# EAGLE board arduino_Uno_Rev3-02-TH (EAGLE 7.7.0)
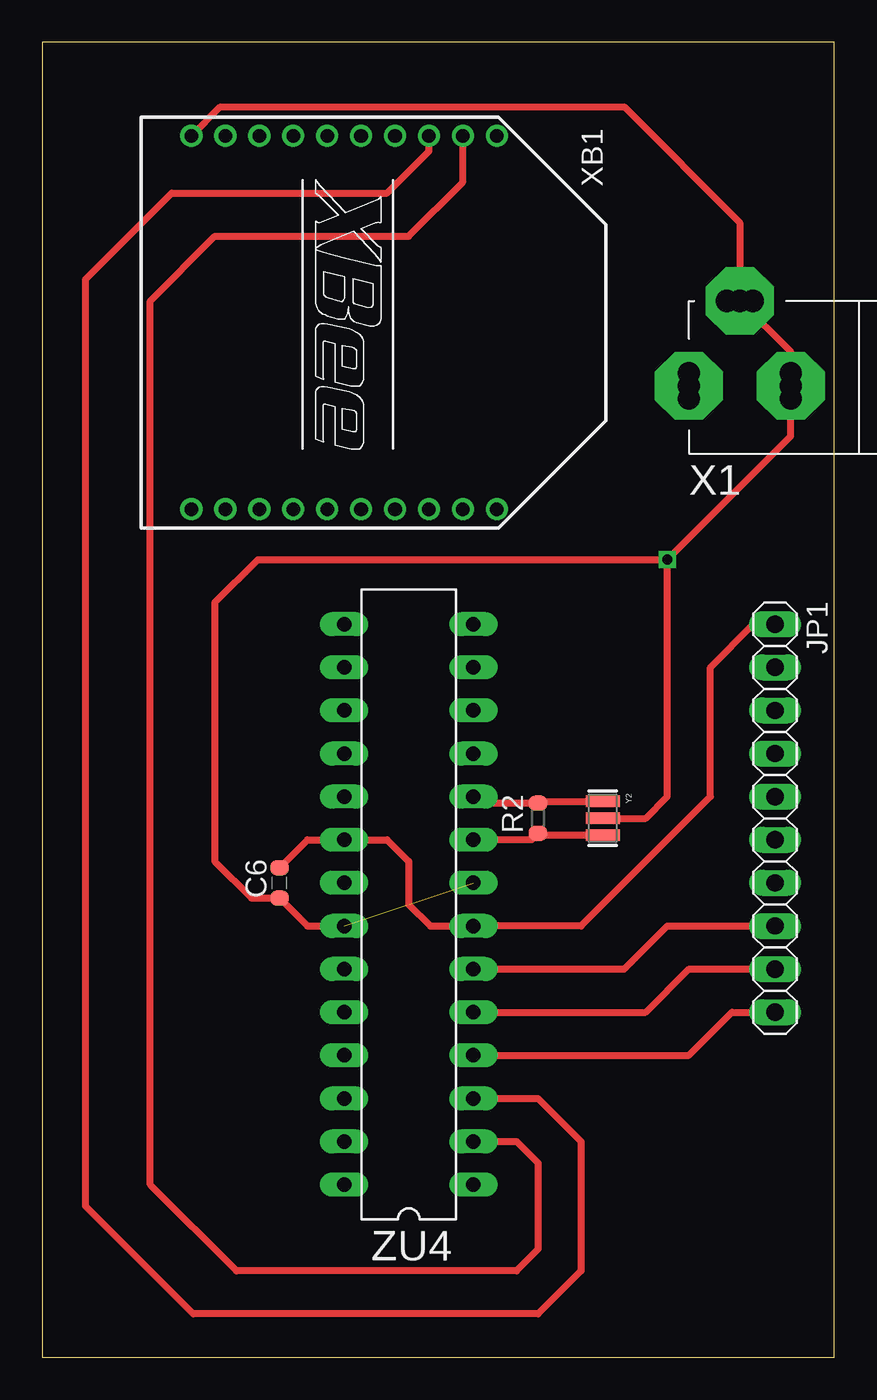
[diagram p0: board, top side]
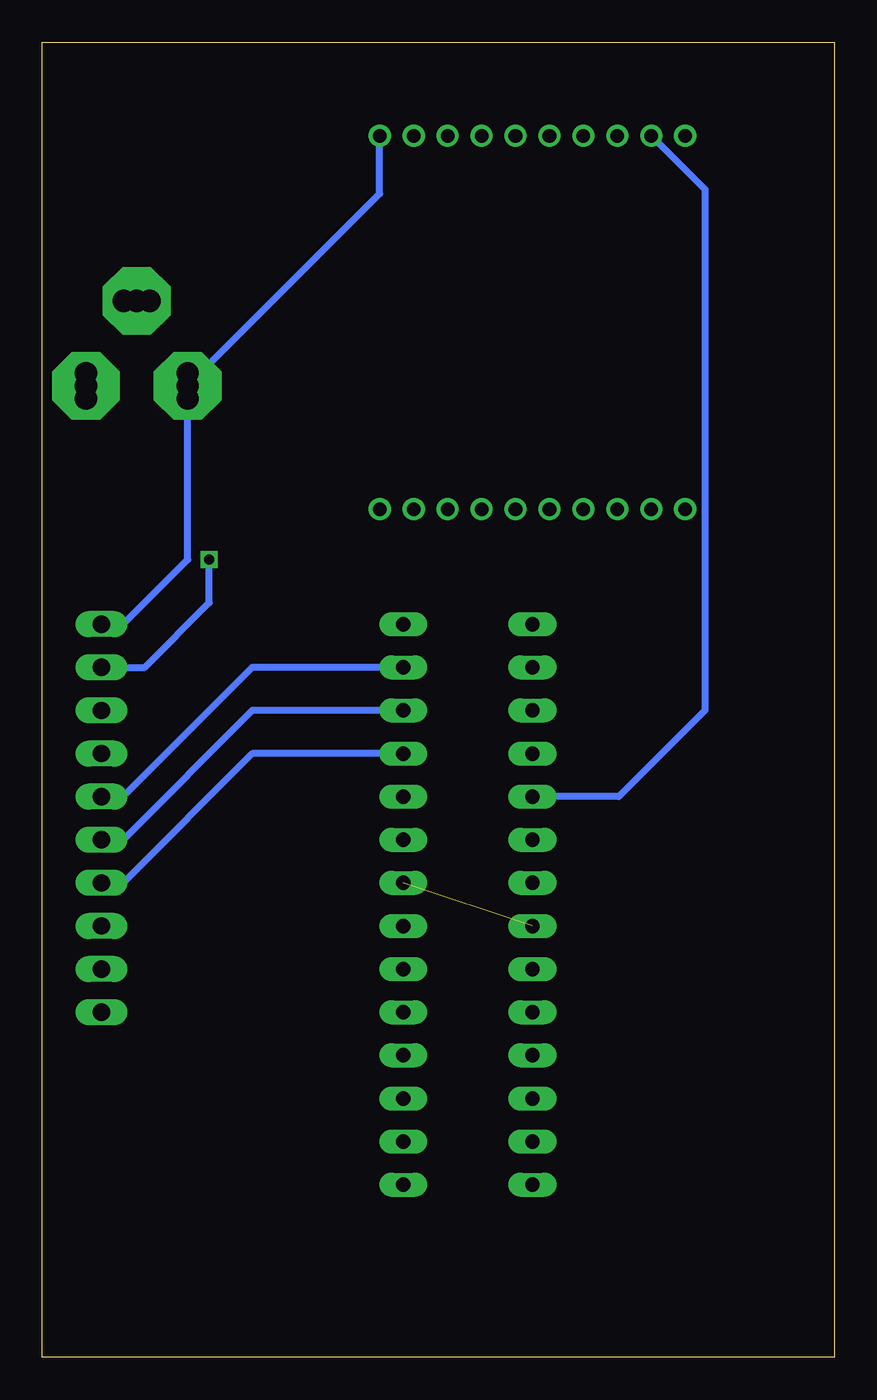
[diagram p1: board, bottom side, seen from below]

Size 46.66 x 77.46 mm. Coordinates in mm from the lower left corner, seen from the top.
Outline: 0,0 46.66,0 46.66,77.46 0,77.46 0,0
Copper layers (1*16): Top 0.035mm / dielectric 1.5mm / Bottom 0.035mm
Design rules "default": minimum track width 10mil, minimum drill 24mil, track to track 8mil, track to pad 8mil, pad to pad 8mil, via to via 8mil, smd to smd 8mil, copper to edge 40mil, drill to drill 8mil, minimum pad ring 10mil, minimum via ring 8mil, stop-mask expansion 4mil, vias tented up to drill 0mil, thermal gap 10mil
Net classes: 0 default: width 0.254 mm, clearance 0.254 mm; 1 power: width 0.61 mm, drill 0.61 mm, clearance 0.254 mm; 2 gnd: width 0.305 mm, drill 0.559 mm, clearance 0.254 mm; 3 usbvcc: width 0.508 mm, drill 0.61 mm, clearance 0.254 mm; 4 aref: width 0.406 mm, drill 0.61 mm, clearance 0.254 mm

## Footprints (pad centres in the part's own frame; a part is rotated, then mirrored left to right if it is on the bottom)
C0603-ROUND = smd 0.898 x 1.1: 1 -0.889,0; 2 0.889,0
1X10 = drill 1.016 long: 1 -11.43,0; 2 -8.89,0; 3 -6.35,0; 4 -3.81,0; 5 -1.27,0; 6 1.27,0; 7 3.81,0; 8 6.35,0; 9 8.89,0; 10 11.43,0
R0603-ROUND = smd 0.898 x 1.1: 1 -0.889,0; 2 0.889,0
POWERSUPPLY_DC-21MM = drill 1.3 pad 4 octagon: 1 -5.08,-3.353; 2 -0.076,-6.35; 3 -0.076,-0.356 | drill 1.3: 4 -5.08,-4.115; 5 -5.08,-2.591; 6 -0.838,-0.356; 7 0.686,-0.356; 8 -0.838,-6.35; 9 0.686,-6.35
XBEE = drill 0.8 pad 1.27: 1 -11,9; 2 -11,7; 3 -11,5; 4 -11,3; 5 -11,1; 6 -11,-1; 7 -11,-3; 8 -11,-5; 9 -11,-7; 10 -11,-9; 11 11,-9; 12 11,-7; 13 11,-5; 14 11,-3; 15 11,-1; 16 11,1; 17 11,3; 18 11,5; 19 11,7; 20 11,9
RESONATOR = smd 0.7 x 2: 1 -1,0; 2 0,0; 3 1,0
DIL28-3 = drill 0.85 pad 1.422 long: 1 -16.51,-3.81; 2 -13.97,-3.81; 3 -11.43,-3.81; 4 -8.89,-3.81; 5 -6.35,-3.81; 6 -3.81,-3.81; 7 -1.27,-3.81; 8 1.27,-3.81; 9 3.81,-3.81; 10 6.35,-3.81; 11 8.89,-3.81; 12 11.43,-3.81; 13 13.97,-3.81; 14 16.51,-3.81; 15 16.51,3.81; 16 13.97,3.81; 17 11.43,3.81; 18 8.89,3.81; 19 6.35,3.81; 20 3.81,3.81; 21 1.27,3.81; 22 -1.27,3.81; 23 -3.81,3.81; 24 -6.35,3.81; 25 -8.89,3.81; 26 -11.43,3.81; 27 -13.97,3.81; 28 -16.51,3.81

## Placement (x,y rotation side)
C6  100n  [C0603-ROUND]  13.97,27.94 90 top
JP1  [1X10]  43.18,31.75 270 top
R2  1M  [R0603-ROUND]  29.21,31.75 90 top
X1  POWERSUPPLY_DC21MMX  [POWERSUPPLY_DC-21MM]  44.45,57.15 270 top
XB1  XBEE  [XBEE]  17.78,60.96 270 top
Y2  CSTCE16M0V53-R0 16MHZ  [RESONATOR]  33.02,31.75 270 top
ZU4  ATMEGA328P-PU  [DIL28-3]  21.59,26.67 90 top

## Library data of the parts
C6 R2 X1 Y2 ZU4 = SmartPrj
JP1 = pinhead
XB1 = maxstream; MPN: XBP24-Z7UIT-004; OC_FARNELL: 1751799; OC_NEWARK: 34R5507

## Nets
AREF [aref]: ZU4.21
GND [gnd]: C6.1 X1.1 X1.3 XB1.10 Y2.2 ZU4.8 ZU4.22
N$1: XB1.3 ZU4.3
N$2: JP1.10 ZU4.4
N$3: XB1.2 ZU4.2
N$4: JP1.5 ZU4.13
N$5: JP1.8 ZU4.6
N$6: JP1.7 ZU4.11
N$7: JP1.6 ZU4.12
N$8: JP1.9 ZU4.5
N$9: XB1.9 ZU4.19
S$1 [gnd]: JP1.2
VCC: C6.2 JP1.1 X1.2 XB1.1 ZU4.7 ZU4.20
XTAL1: R2.1 Y2.3 ZU4.9
XTAL2: R2.2 Y2.1 ZU4.10

## Tracks (layer width: path | path; a pad name or v marks a point on that pad's centre or on a via)
GND  (via drill 0.6)  (1 unrouted)
  Top 0.406: ZU4.22 15.62,25.4 C6.1 12.32,27.05 10.16,29.21 10.16,44.45 12.7,46.99 v36.83,46.99 | XB1.10 10.48,73.66 34.29,73.66 41.1,66.85 X1.1 44.09,59.23 X1.3 44.09,54.25 v36.83,46.99 | Y2.2 35.56,31.75 36.83,33.02 v36.83,46.99
N$1
  Top 0.406: ZU4.3 29.21,15.24 31.75,12.7 31.75,5.08 29.21,2.54 8.89,2.54 2.54,8.89 2.54,63.5 7.62,68.58 20.32,68.58 22.78,71.04 XB1.3
N$2
  Top 0.406: ZU4.4 38.1,17.78 40.64,20.32 JP1.10
N$3
  Top 0.406: ZU4.2 27.94,12.7 29.21,11.43 29.21,6.35 27.94,5.08 11.43,5.08 6.35,10.16 6.35,62.23 10.16,66.04 21.59,66.04 24.78,69.23 XB1.2
N$4
  Bottom 0.406: ZU4.13 34.29,40.64 41.91,33.02 JP1.5
N$5
  Top 0.406: ZU4.6 34.29,22.86 36.83,25.4 JP1.8
N$6
  Bottom 0.406: ZU4.11 34.29,35.56 41.91,27.94 JP1.7
N$7
  Bottom 0.406: ZU4.12 34.29,38.1 41.91,30.48 JP1.6
N$8
  Top 0.406: ZU4.5 35.56,20.32 38.1,22.86 JP1.9
N$9
  Bottom 0.406: XB1.9 7.62,68.8 7.62,38.1 12.7,33.02 ZU4.19
S$1
  Bottom 0.406: JP1.2 40.64,40.64 36.83,44.45 36.83,46.99
VCC
  Top 0.406: JP1.1 41.91,43.18 39.37,40.64 39.37,33.02 31.75,25.4 ZU4.7 22.86,25.4 21.59,26.67 21.59,29.21 20.32,30.48 ZU4.20 15.62,30.48 C6.2
  Bottom 0.406: JP1.1 41.91,43.18 38.1,46.99 X1.2 26.78,68.55 XB1.1
XTAL1
  Top 0.406: ZU4.9 28.83,30.48 R2.1 29.32,30.75 Y2.3
XTAL2
  Top 0.406: ZU4.10 25.78,32.64 R2.2 29.32,32.75 Y2.1